# Altium PCB Gimbal19_V1.PcbDoc
Units mm, origin at the board's own origin, x right, y up, seen from the top; angles counter-clockwise.
Board outline 63 x 50 mm, 2 copper layers (Top Layer, Bottom Layer); 67 components, 35 nets, 217 pads, 40 vias.
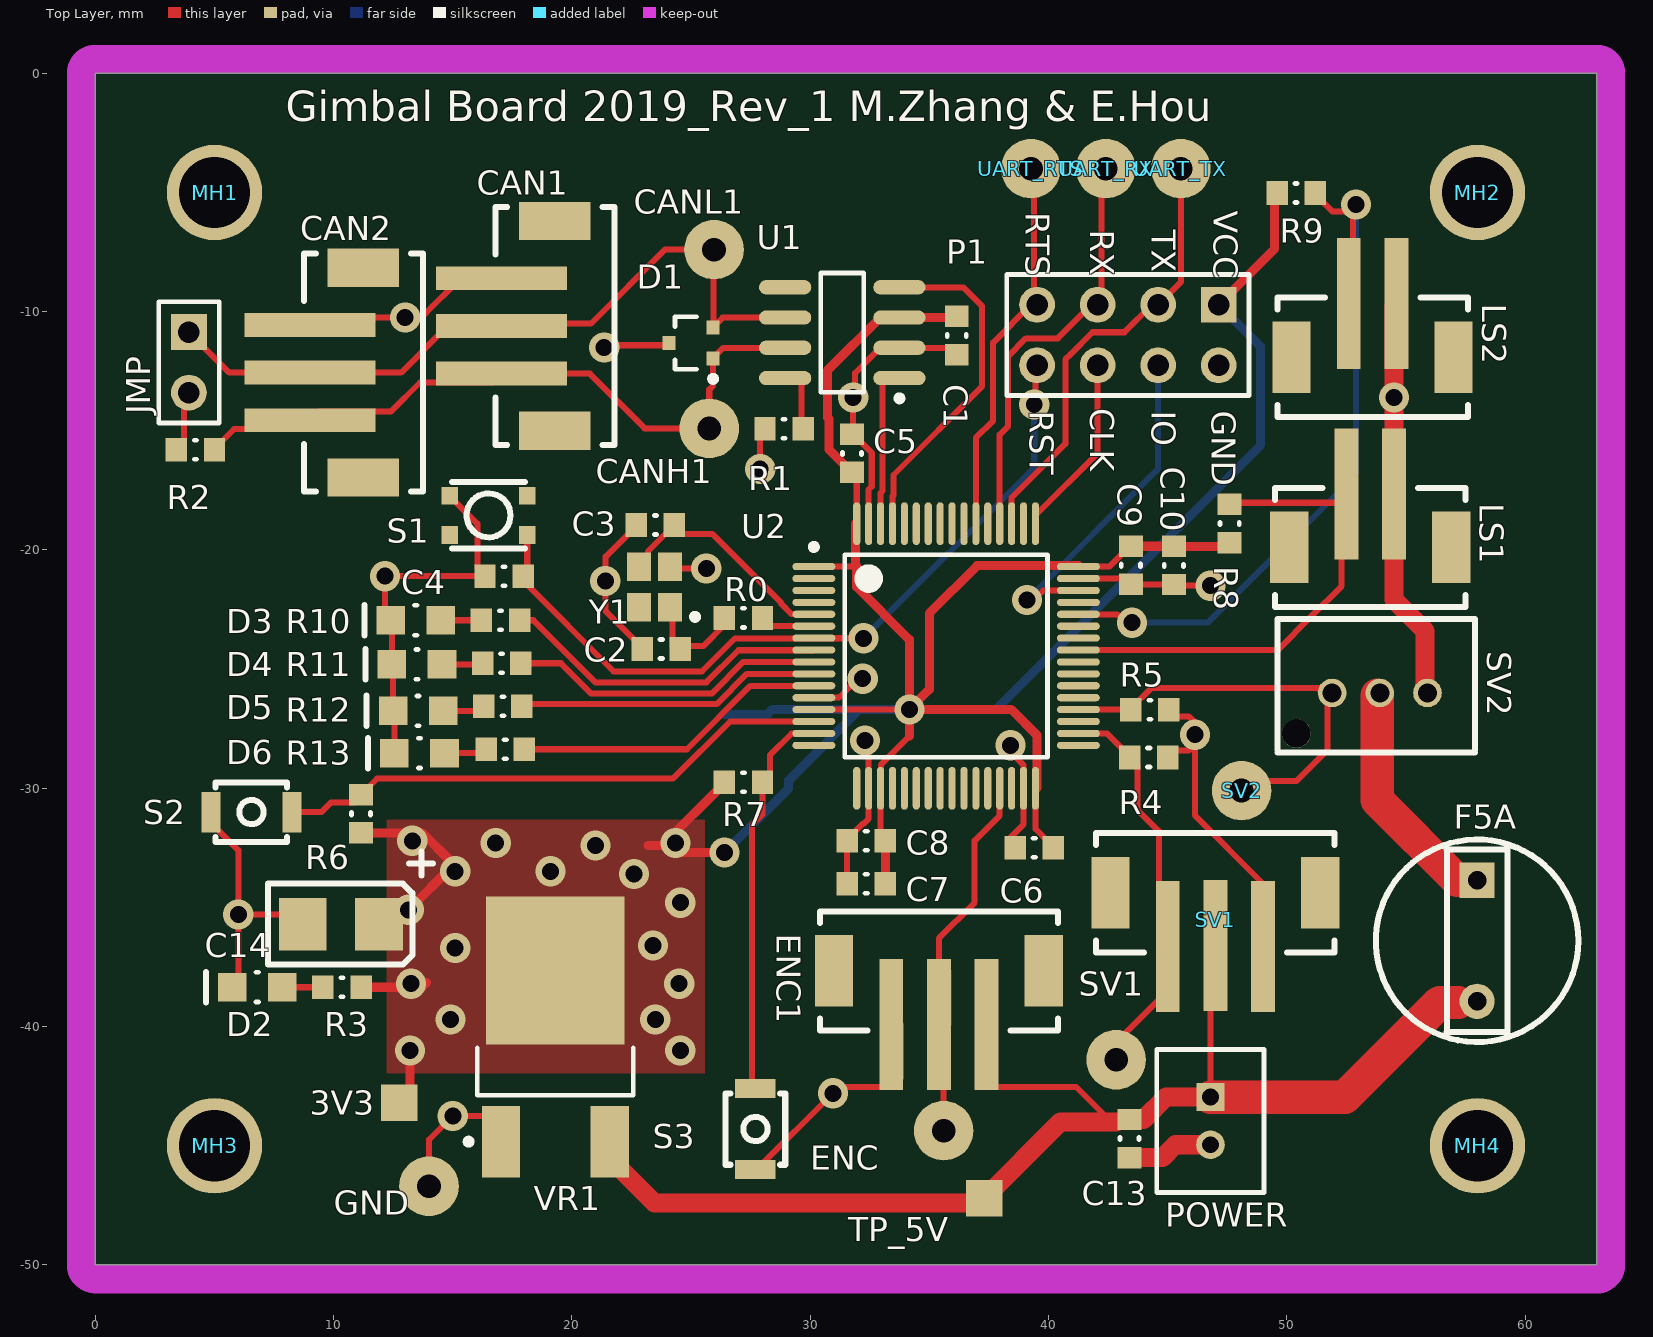
[diagram p0: Top Layer view]
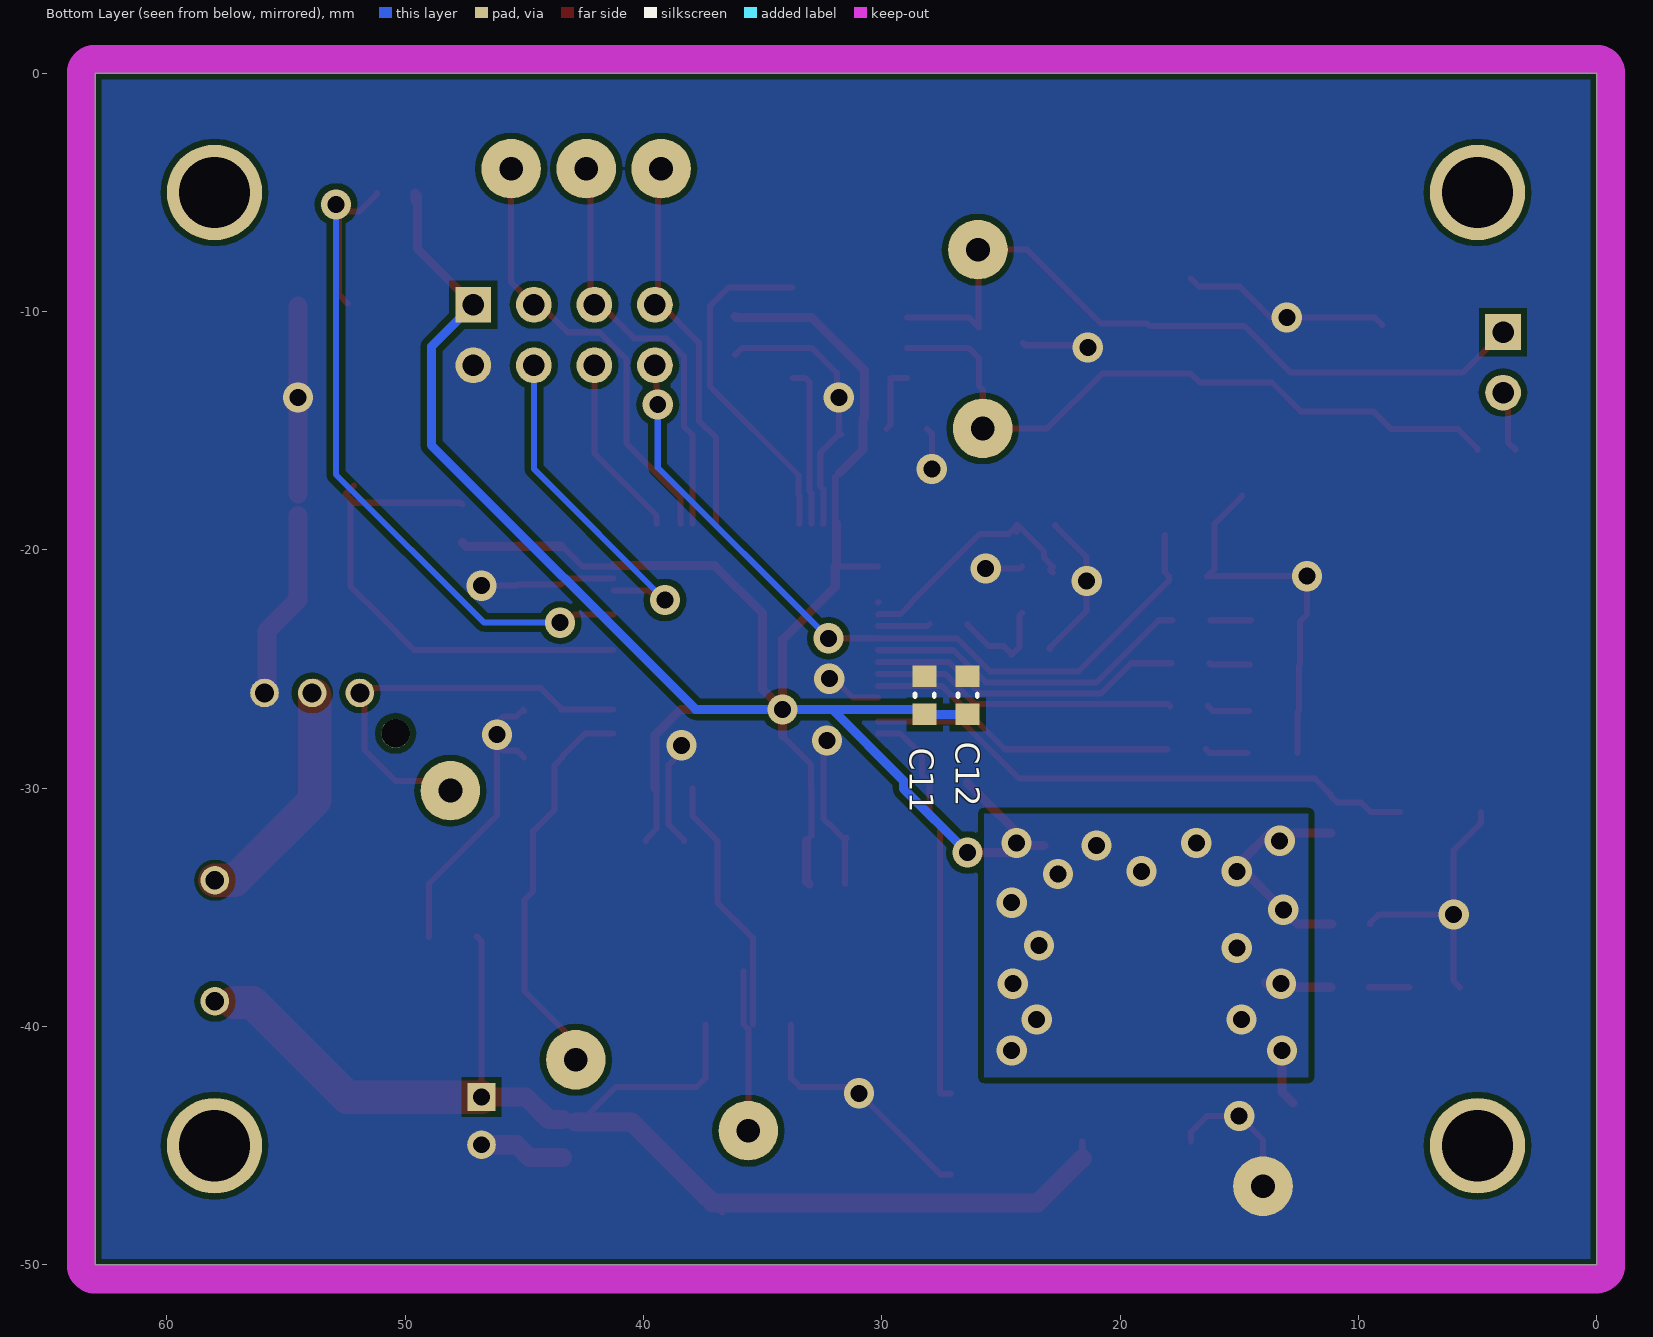
[diagram p1: Bottom Layer view, seen from below]

## Layer stack, top to bottom
Top Solder: solder mask 0.0102, Solder Resist, Dk 3.5
Top Layer: signal copper 0.0356
Dielectric 1: dielectric 0.32, FR-4, Dk 4.8
Bottom Layer: signal copper 0.0356
Bottom Solder: solder mask 0.0102, Solder Resist, Dk 3.5

## Board outline
0,-50 0,0 63,0 63,-50

## Design rules (kind name [scope] priority, off if disabled: settings)
Clearance Clearance_1 [All] p1: gap=0.254 ignorepadtopadclearanceinfootprint=TRUE except(0: Arc-Hole Track-Hole SMDPad-Hole THPad-Hole Via-Hole Fill-Hole Poly-Hole Region-Hole Text-Hole; 0.203: Arc-Arc Arc-Track Arc-SMDPad Track-Track Track-SMDPad)
HoleSize [All] p1: absolutevalues=TRUE maxlimit=3.5 minlimit=0.025 maxpercent=80.000 minpercent=20.000
PolygonConnect [All] p1: connectstyle=Direct reliefconductorwidth=0.254 reliefentries=4 polygonreliefangle="90 Angle" airgapwidth=0.254
RoutingVias [All] p1: holewidth=0.406 width=0.711 viastyle="Through Hole" minholewidth=0.406 minwidth=0.711 maxholewidth=0.711 maxwidth=1.27
SolderMaskExpansion [All] p1: expansion=0.102
Width [All] p1: maxlimit=1.5 minlimit=0.254 preferedwidth=0.254
29 further rules are at their usual default settings.

## Classes and differential pairs
component class support: D3 D4 D5 D6 ENC MH1 MH2 MH3 MH4 R4 R5 R6 R7 R8 R9 R10 R11 R12 R13 S2 S3 SV1 SV2 UART_RTS UART_RX UART_TX
component class power: 3V3 C13 C14 D2 GND R3 TP_5V VR1
component class mcu: C2 C3 C4 C5 C6 C7 C8 C9 C10 C11 C12 R0 S1 U2 Y1
component class connectors: CAN1 CAN2 ENC1 F5A LS1 LS2 P1 POWER SV1 SV2
component class can: C1 CANH1 CANL1 D1 JMP R1 R2 U1

## Components (designator, comment, footprint, x,y, rotation, side; value= is the part's Value field where it differs from the comment)
3V3 "*" TESTPOINT 12.75,-43.2 r90 top
C1 "CAP_0.1uF_16V_0603" CAPC0603(1608)55_N 36.147,-11 r90 top value=0.1uF
C2 "CAP_15pF_0603" CAPC0603(1608)55_N 23.75,-24.159 r0 top value=15pF
C3 "CAP_15pF_0603" CAPC0603(1608)55_N 23.5,-18.95 r0 top value=15pF
C4 "CAP_0.1uF_16V_0603" CAPC0603(1608)55_N 17.15,-21.104 r0 top value=0.1uF
C5 "CAP_0.1uF_16V_0603" CAPC0603(1608)55_N 31.75,-15.946 r90 top value=0.1uF
C6 "CAP_0.1uF_16V_0603" CAPC0603(1608)55_N 39.4,-32.5 r180 top value=0.1uF
C7 "CAP_0.1uF_16V_0603" CAPC0603(1608)55_N 32.35,-34.009 r180 top value=0.1uF
C8 "CAP_4.7uF_0603" CAPC0603(1608)55_N 32.35,-32.204 r0 top value=4.7uF
C9 "CAP_0.1uF_16V_0603" CAPC0603(1608)55_N 43.455,-20.644 r270 top value=0.1uF
C10 "CAP_4.7uF_0603" CAPC0603(1608)55_N 45.259,-20.65 r90 top value=4.7uF
C11 "CAP_10nF_0603" CAPC0603(1608)55_N 28.2,-26.1 r270 bottom value=10nF
C12 "CAP_1uF_16V_0603" CAPC0603(1608)55_N 26.396,-26.1 r270 bottom value=1uF
C13 "CAP_0.33uF_16V_0603" CAPC0603(1608)55_N 43.4,-44.7 r90 top value=0.33uF
C14 "CAP_10uF_1411_POL" AVX-CAPC3528_V 10.3,-35.7 r180 top value=10uF
CAN1 "CON_3M" JST-B3B-SM4-TB#1 21.785,-10.6 r90 top
CAN2 "CON_3M" JST-B3B-SM4-TB#1 13.75,-12.556 r90 top
CANH1 "TESTPOINT_LOOP" TESTPOINT_LOOP#1 25.761,-14.9 r270 top
CANL1 "TESTPOINT_LOOP" TESTPOINT_LOOP#1 25.962,-7.4 r270 top
D1 "TVS_DIODE_CAN" NXP-SOT323-3 25,-11.318 r180 top
D2 "DIO_LED_R" LED_0805_LINE 6.796,-38.35 r180 top
D3 "DIO_LED_Y" LED_0805_LINE 13.446,-22.95 r180 top
D4 "DIO_LED_G" LED_0805_LINE 13.495,-24.8 r180 top
D5 "DIO_LED_G" LED_0805_LINE 13.546,-26.75 r180 top
D6 "DIO_LED_G" LED_0805_LINE 13.6,-28.528 r180 top
ENC "TESTPOINT_LOOP" TESTPOINT_LOOP#1 35.6,-44.37 r0 top
ENC1 "CON_3M" JST-B3B-SM4-TB#1 35.4,-35.163 r180 top
F5A "FUSE" FUSE 57.983,-36.4 r270 top
GND "TESTPOINT_LOOP" TESTPOINT_LOOP#1 14,-46.7 r0 top
JMP "Header 2" HDR1X2 3.928,-10.858 r270 top (schematic designator 1)
LS1 "CON_2M" JST-B2B-SM4-TB 53.5,-22.396 r0 top
LS2 "CON_2M" JST-B2B-SM4-TB 53.6,-14.415 r0 top
MH1 "MOUNTING_HOLES" MOUNTING_HOLE#1 3.25,-4.15 r0 top
MH2 "MOUNTING_HOLES" MOUNTING_HOLE#2 66,0 r0 top
MH3 "MOUNTING_HOLES" MOUNTING_HOLE#3 3.2,-46.2 r0 top
MH4 "MOUNTING_HOLES" MOUNTING_HOLE#4 74.3,0 r0 top
P1 "HEADER 4X2" HEADER_2X4 47.14,-9.71 r180 top
POWER "CON_2M" JST-B2B-PHSK 46.794,-43.959 r270 top
R0 "RES_0R_0603" RESC0603(1608)_N 27.196,-22.85 r180 top value=0R
R1 "RES_0R_0603" RESC0603(1608)_N 28.9,-14.917 r180 top value=0R
R2 "RES_120R_0603" RESC0603(1608)_N 4.2,-15.797 r180 top value=120R
R3 "RES_100R_0603" RESC0603(1608)_N 10.35,-38.35 r0 top value=100R
R4 "RES_10K_0603" RESC0603(1608)_N 44.205,-28.709 r180 top value=10K
R5 "RES_10K_0603" RESC0603(1608)_N 44.25,-26.704 r180 top value=10K
R6 "RES_10K_0603" RESC0603(1608)_N 11.15,-31.07 r270 top value=10K
R7 "RES_10K_0603" RESC0603(1608)_N 27.196,-29.75 r0 top value=10K
R8 "RES_10K_0603" RESC0603(1608)_N 47.6,-18.891 r270 top value=10K
R9 "RES_10K_0603" RESC0603(1608)_N 50.389,-5.019 r180 top value=10K
R10 "RES_100R_0603" RESC0603(1608)_N 17,-22.95 r0 top value=100R
R11 "RES_100R_0603" RESC0603(1608)_N 17.05,-24.754 r0 top value=100R
R12 "RES_100R_0603" RESC0603(1608)_N 17.1,-26.558 r0 top value=100R
R13 "RES_100R_0603" RESC0603(1608)_N 17.2,-28.363 r0 top value=100R
S1 "SW_PWR" PTS830GM140 16.5,-18.548 r0 top
S2 "SW_TACTILE" B3U-1100P 6.55,-31 r180 top
S3 "SW_TACTILE" B3U-1100P 27.7,-44.3 r270 top
SV1 "TESTPOINT_LOOP" TESTPOINT_LOOP#1 42.838,-41.393 r90 top
SV1 "CON_3M" JST-B3B-SM4-TB#2 47,-31.885 r180 top
SV2 "CON_3M" "JST B03B-PASK" 52.9,-26 r180 top
SV2 "TESTPOINT_LOOP" TESTPOINT_LOOP#2 52.25,-43.04 r90 top
TP_5V "*" TESTPOINT 37.3,-47.2 r90 top (schematic designator TESTPOINT_5V)
U1 "IC TXRX CAN" LT-S8_N 31.343,-10.883 r180 top
U2 "STM32F091RC" STM_LQFP64_N 35.701,-24.45 r0 top
UART_RTS "TESTPOINT_LOOP" TESTPOINT_LOOP#3 39.26,-3.85 r90 top
UART_RX "TESTPOINT_LOOP" TESTPOINT_LOOP#4 42.4,-3.8 r90 top
UART_TX "TESTPOINT_LOOP" TESTPOINT_LOOP#1 45.55,-4 r90 top
VR1 "5V0_3V3_LDO" VOLTAGE_REGULATOR 19.3,-42.04 r0 top
Y1 "CRYSTAL_32MHZ" AVX-CX2520DB32000D0GEJZ1-4_V 23.466,-21.554 r180 top

## Footprints (in the part's own frame and the unit in brackets; to place one, negate y for a bottom-side part, rotate by r counter-clockwise, add the part's x,y. Pads: shape width x height; smd on the part's side, far side on the other; paste and mask are expansions set on the pad)
AVX-CAPC3528_V [mm] "SMT Capacitor, 2 Leads, Body 3.5x2.8mm"
  rect 2x2.2 smd: 1(-1.6,0) 2(1.6,0)
  silkscreen extent -3.87,-3.05 3.05,1.7, body extent -1.79,-1.54 1.8,1.54, height 1.9
AVX-CX2520DB32000D0GEJZ1-4_V [mm] "Hand Drawn, 4-Leads,Body 2.5x2mm"
  rect 1x1.2 smd: 1(-0.65,0.85) 2(-0.65,-0.85) 3(0.65,-0.85) 4(0.65,0.85)
  silkscreen extent -1.83,1.13 -1.58,1.38, body extent -1,-1.25 1,1.25, height 0.55
B3U-1100P [mm] "TACTILE SWITCH GREY"
  rect 0.8x1.7 smd: 1(-1.7,0) 2(1.7,0)
  silkscreen extent -1.5,-1.25 1.5,1.25
CAPC0603(1608)55_N [mm] "Chip Capacitor, Body 1.6x0.8mm, Height 0.55mm, IPC Medium Density"
  rect 0.9x1 smd: 1(-0.8,0) 2(0.8,0)
  silkscreen extent -0.05,-0.4 0.05,0.4, body extent -0.87,-0.48 0.88,0.47, height 0.55
FUSE [mm] "FUSE HOLDER RADIAL 250V 6.3A PCB"
  rect 1.48x1.48 / inner round 1.524 / far side round 1.2 hole 0.78: 1(-2.54,0)
  round 1.48 / inner round 1.524 / far side round 1.2 hole 0.78: 2(2.54,0)
  silkscreen extent -4.25,-4.25 4.25,4.25
HDR1X2 [mm] "Connector; Header; 2 Position"
  rect 1.5x1.5 hole 0.9: 1(0,0)
  round 1.5 hole 0.9: 2(2.54,0)
  silkscreen extent -1.27,-1.27 3.81,1.27
HEADER_2X4 [mm]
  rect 1.5x1.5 hole 0.9: 1(0,0)
  round 1.5 hole 0.9: 2(2.54,0) 3(5.08,0) 4(7.62,0) 5(0,2.54) 6(2.54,2.54) 7(5.08,2.54) 8(7.62,2.54)
  silkscreen extent -1.27,-1.27 8.89,3.81
"JST B03B-PASK" [mm] "PA TOP 3A 3POS 2mm Pitch"
  round 1.2 / inner round 1.524 / far side round 1.2 hole 0.8: 1(-3,0) 2(-1,0) 3(1,0)
  round 1.2 hole 1.2: 4(2.5,1.7)
  silkscreen extent -5,-3.1 3.3,2.5
JST-B2B-PHSK [mm]
  rect 1.162x1.162 / inner rect 1.524x1.524 / far side rect 1.162x1.162 hole 0.7: 1(-1,0)
  round 1.2 / inner round 1.524 / far side round 1.2 hole 0.7: 2(1,0)
  silkscreen extent -3,-2.25 3,2.25
JST-B2B-SM4-TB [mm]
  rect 1x5.5 smd: 1(-1,4.75) 2(1,4.75)
  rect 1.6x3 smd: 3(-3.4,2.5) 4(3.4,2.5)
  silkscreen extent -4,0 4,5
JST-B3B-SM4-TB#1 [mm]
  rect 1x5.5 smd: 1(-2,4.75) 2(0,4.75) 3(2,4.75)
  rect 1.6x3 smd: 4(-4.4,2.5) 5(4.4,2.5)
  silkscreen extent -5,0 5,5
JST-B3B-SM4-TB#2 [mm]
  rect 1x5.5 smd: 1(-2,4.75) 2(0,4.715) 3(2,4.75)
  rect 1.6x3 smd: 4(-4.4,2.5) 5(4.4,2.5)
  silkscreen extent -5,0 5,5
LED_0805_LINE [mm] "SMD, 2-Leads, Body 2x1.25mm"
  rect 1.2x1.2 smd: 1(-1.05,0) 2(1.05,0)
  silkscreen extent -0.05,-0.63 2.16,0.64, body extent -1,-0.63 1,0.63, height 0.8
LT-S8_N [mm] "SOP, 8-Leads, Body 4.9x3.9mm, Pitch 1.27mm, IPC Medium Density"
  oval 2.2x0.6 smd: 1(-2.4,1.905) 2(-2.4,0.635) 3(-2.4,-0.635) 4(-2.4,-1.905) 5(2.4,-1.905) 6(2.4,-0.635) 7(2.4,0.635) 8(2.4,1.905)
  silkscreen extent -2.53,-2.5 0.9,2.88, body extent -2,-2.5 2,2.5, height 1.76
MOUNTING_HOLE#1 [mm]
  round 4 hole 3 unplated: 0(1.75,-0.85)
MOUNTING_HOLE#2 [mm]
  round 4 hole 3 unplated: 0(-8,-5)
MOUNTING_HOLE#3 [mm]
  round 4 hole 3 unplated: 0(1.8,1.2)
MOUNTING_HOLE#4 [mm]
  round 4 hole 3 unplated: 0(-16.3,-45)
NXP-SOT323-3 [mm] "SOT23, 3-Leads, Body 2.2x1.35mm, Pitch 0.65mm"
  rect 0.55x0.6 smd paste-1: 1(-0.925,0.65) 2(-0.925,-0.65) 3(0.925,0)
  silkscreen extent -1.05,-1.1 0.67,1.62, body extent -1.15,-1.1 1.15,1.1, height 1.1
PTS830GM140 [mm] "PWR TACTILE SWITCH (RED)"
  rect 0.7x0.75 smd: 1(-1.625,0.825) 2(1.625,0.825) 3(-1.625,-0.825) 4(1.625,-0.825)
  silkscreen extent -1.53,-1.4 1.53,1.4
RESC0603(1608)_N [mm] "Chip Resistor, Body 1.6x0.8mm, IPC Medium Density"
  rect 0.9x1 smd: 1(-0.8,0) 2(0.8,0)
  silkscreen extent -0.05,-0.4 0.05,0.4, body extent -0.85,-0.47 0.85,0.47, height 0.6
STM_LQFP64_N [mm] "Thin QFP, 64-Leads, Body 10x10mm, Pitch 0.5mm, IPC Medium Density"
  oval 1.8x0.3 smd mask+0.05: 1(-5.55,3.75) 2(-5.55,3.25) 3(-5.55,2.75) 4(-5.55,2.25) 5(-5.55,1.75) 6(-5.55,1.25) 7(-5.55,0.75) 8(-5.55,0.25) 9(-5.55,-0.25) 10(-5.55,-0.75) 11(-5.55,-1.25) 12(-5.55,-1.75) 13(-5.55,-2.25) 14(-5.55,-2.75) 15(-5.55,-3.25) 16(-5.55,-3.75) 33(5.55,-3.75) 34(5.55,-3.25) 35(5.55,-2.75) 36(5.55,-2.25) 37(5.55,-1.75) 38(5.55,-1.25) 39(5.55,-0.75) 40(5.55,-0.25) 41(5.55,0.25) 42(5.55,0.75) 43(5.55,1.25) 44(5.55,1.75) 45(5.55,2.25) 46(5.55,2.75) 47(5.55,3.25) 48(5.55,3.75)
  oval 0.3x1.8 smd mask+0.05: 17(-3.75,-5.55) 18(-3.25,-5.55) 19(-2.75,-5.55) 20(-2.25,-5.55) 21(-1.75,-5.55) 22(-1.25,-5.55) 23(-0.75,-5.55) 24(-0.25,-5.55) 25(0.25,-5.55) 26(0.75,-5.55) 27(1.25,-5.55) 28(1.75,-5.55) 29(2.25,-5.55) 30(2.75,-5.55) 31(3.25,-5.55) 32(3.75,-5.55) 49(3.75,5.55) 50(3.25,5.55) 51(2.75,5.55) 52(2.25,5.55) 53(1.75,5.55) 54(1.25,5.55) 55(0.75,5.55) 56(0.25,5.55) 57(-0.25,5.55) 58(-0.75,5.55) 59(-1.25,5.55) 60(-1.75,5.55) 61(-2.25,5.55) 62(-2.75,5.55) 63(-3.25,5.55) 64(-3.75,5.55)
  silkscreen extent -5.67,-4.25 4.25,4.7, body extent -5,-5 5,5, height 1.6
TESTPOINT [mil]
  rect 60x60 smd: 1(0,0)
TESTPOINT_LOOP#1 [mm]
  round 2.5 hole 1: 1(0,0)
TESTPOINT_LOOP#2 [mm]
  round 2.5 hole 1: 1(12.94,4.15)
TESTPOINT_LOOP#3 [mm]
  round 2.5 hole 1: 1(-0.15,0)
TESTPOINT_LOOP#4 [mm]
  round 2.5 hole 1: 1(-0.2,0)
VOLTAGE_REGULATOR [mm] "DPAK, 3-Leads, Body 6.095x6.54mm, Pitch 4.57mm"
  rect 1.6x3 smd: 1(-2.285,-2.79) 3(2.285,-2.79)
  rect 5.8x6.2 smd: 2(0,4.39)
  silkscreen extent -3.76,-2.91 3.27,1.14, body extent -3.27,-0.84 3.27,5.25, height 2.38

## Part data
3V3 TP_5V: "TESTPOINT_SMD"
C1 C4 C5 C6 C7 C9: "CAP CER 0.1UF 16V X7R 0603", Digikey Part Number=311-1088-1-ND, Manufacturer=Yageo, MPN=CC0603KRX7R7BB104, Package="0603 (1608 Metric)", Temperature Coefficient=X7R, Voltage Rating=16V, Dimensions="0.063\" L x 0.031\" W (1.60mm x 0.80mm)"
C2 C3: "CAP CER 15PF 250V NPO 0603", Digikey Part Number=311-3282-1-ND, Manufacturer=Yageo, MPN=AC0603JRNPOYBN150, Package="0603 (1608 Metric)", Temperature Coefficient=NP0, Voltage Rating=250v, Dimensions="0.063\" L x 0.031\" W (1.60mm x 0.80mm)"
C8 C10: "CAP CER 4.7UF 6.3V X5R 0603", Digikey Part Number=311-1521-1-ND, Manufacturer=Yageo, MPN=CC0603KRX5R5BB475, Package="0603 (1608 Metric)", Temperature Coefficient=X5R, Voltage Rating=6.3V, Dimensions="0.063\" L x 0.031\" W (1.60mm x 0.80mm)"
C11: "CAP CER 10000PF 16V X7R 0603", Digikey Part Number=311-3369-1-ND, Manufacturer=Yageo, MPN=CC0603KRX7R7BB103, Package="0603 (1608 Metric)", Temperature Coefficient=X7R, Voltage Rating=16V, Dimensions="0.063\" L x 0.031\" W (1.60mm x 0.80mm)"
C12: "CAP CER 1UF 16V Y5V 0603", Digikey Part Number=311-1372-1-ND, Manufacturer=Yageo, MPN=CC0603ZRY5V7BB105, Package="0603 (1608 Metric)", Temperature Coefficient=Y5V, Voltage Rating=16V, Dimensions="0.063\" L x 0.031\" W (1.60mm x 0.80mm)"
C13: "CAP CER 0.33UF 16V X7R 0603", Digikey Part Number=490-6050-1-ND, Manufacturer="Murata Electronics North America", MPN=GCM188R71C334KA37D, Package="0603 (1608 Metric)", Temperature Coefficient=X7R, Voltage Rating=16V, Dimensions="0.063\" L x 0.031\" W (1.60mm x 0.80mm)"
C14: "CAP TANT 10UF 20% 10V 1411", Digikey Part Number=478-12047-1-ND, Manufacturer="AVX Corporation", MPN=F971A106MBAHT3, Package="1411 (3528 Metric)", Voltage Rating=10V, Dimensions="0.063\" L x 0.031\" W (1.60mm x 0.80mm)"
D1: "TVS DIODE 24V 41V SOT323-3", Digikey Part Number=1727-3891-1-ND, Manufacturer="Nexperia USA Inc.", MPN=PESD2CAN,215, Package="SC-70, SOT-323", ComponentLink1Description=Datasheet, ComponentLink1URL=https://assets.nexperia.com/documents/data-sheet/PESD1CAN-U.pdf
D2: "LED RED DIFFUSED 0805 SMD", Digikey Part Number=475-1278-1-ND, Forward Voltage Drop=2V, Manufacturer=OSRAM, MPN="LS R976-NR-1", Package="0805 (2012 Metric)"
D3: "LED YELLOW DIFFUSED 0805 SMD", Digikey Part Number=475-2560-1-ND, Forward Voltage Drop=2.2V, Manufacturer=OSRAM, MPN="LY R976-PS-36", Package="0805 (2012 Metric)"
D4 D5 D6: "LED GREEN DIFFUSED 0805 SMD", Digikey Part Number=475-1410-1-ND, Forward Voltage Drop=2.2V, Manufacturer=OSRAM, MPN="LG R971-KN-1", Package="0805 (2012 Metric)"
F5A: library part FUSE-5A, "FUSE HOLDER RADIAL 250V 6.3A PCB"
JMP: "Header, 2-Pin", LatestRevisionDate=17-Jul-2002, LatestRevisionNote="Re-released for DXP Platform.", Publisher="Altium Limited"
MH1 MH2 MH3 MH4: "6cm x 6cm"
P1: "Header, 4-Pin Dual row", Digikey Part Number=S9015E-04-ND, Manufacturer="Sullins Connector Solutions", MPN=GRPB042VWVN-RC
R0 R1: "RES SMD 0 OHM JUMPER 1/10W 0603", Digikey Part Number=311-0.0GRCT-ND, Manufacturer=Yageo, MPN=RC0603JR-070RL, Package="0603 (1608 Metric)", Dimensions="0.063\" L x 0.031\" W (1.60mm x 0.80mm)"
R2: "RES SMD 120 OHM 5% 1/10W 0603", Digikey Part Number=311-120GRCT-ND, Manufacturer=Yageo, MPN=RC0603JR-07120RL, Package="0603 (1608 Metric)", Tolerance=5%, Dimensions="0.063\" L x 0.031\" W (1.60mm x 0.80mm)"
R3 R10 R11 R12 R13: "RES SMD 100 OHM 1% 1/10W 0603", Digikey Part Number=311-100HRCT-ND, Manufacturer=Yageo, MPN=RC0603FR-07100RL, Package="0603 (1608 Metric)", Tolerance=1%, Dimensions="0.063\" L x 0.031\" W (1.60mm x 0.80mm)"
R4 R5 R6 R7 R8 R9: "RES SMD 10K OHM 5% 1/10W 0603", Digikey Part Number=311-10KGRCT-ND, Manufacturer=Yageo, MPN=RC0603JR-0710KL, Package="0603 (1608 Metric)", Tolerance=5%, Dimensions="0.063\" L x 0.031\" W (1.60mm x 0.80mm)"
S1: "Power Switch (Red)", Digikey Part Number=CKN10587CT-ND, Manufacturer=C&K, MPN="PTS830GM140 SMTR LFS", ComponentLink1Description=Datasheet, ComponentLink1URL=https://www.ckswitches.com/media/1478/pts830.pdf
S2 S3: "Tactile Switch (Grey)", Digikey Part Number=SW1021TR-ND, Manufacturer="Omron Electronics Inc-EMC Div", MPN=B3U-1100P
U1: library part LTC2875, "IC TXRX CAN 4MBPS 8SO", Digikey Part Number=LTC2875IS8#PBF-ND, Manufacturer="Linear Technologies", MPN=LTC2875IS8#PBF, Package="8-SOIC (0.154\", 3.90mm Width)", ComponentLink1Description=Datasheet, ComponentLink1URL=https://www.analog.com/media/en/technical-documentation/data-sheets/2875f.pdf
U2: Digikey Part Number=497-15167-ND, Manufacturer=STMicroelectronics, Package=64-LQFP, ComponentLink1Description=Datasheet, ComponentLink1URL=https://www.st.com/content/ccc/resource/technical/document/datasheet/95/3c/2e/5b/21/09/45/a6/DM00115237.pdf/files/DM00115237.pdf/jcr:content/translations/en.DM00115237.pdf#%5B%7B%22num%22%3A96%2C%22gen%22%3A0%7D%2C%7B%22name%22%3A%22XYZ%22%7D%2C67%2C755%2Cnull%5D, MPN=STM32F091RC
VR1: "IC REG LINEAR 3.3V 1A DPAK", Current Output=1A, Digikey Part Number=NCP1117DT33T5GOSCT-ND, Manufacturer="ON Semiconductor", MPN=NCP1117DT33T5G
Y1: "CRYSTAL 32MHZ 8PF SMD", Digikey Part Number=1253-1730-1-ND, Manufacturer="Kyocera International Inc. Electronic Components", MPN=CX2520DB32000D0GPSC1, Package="4-SMD, No Lead", Dimensions="0.098\" L x 0.079\" W (2.50mm x 2.00mm)"

## Via types
v1: diameter 1.27, hole 0.711, Top Layer to Bottom Layer, 40 vias

## Nets (pads, with @x,y where several pads share a name; then routed paths per layer and width w, separated by ;. In a path a pad name is that pad's centre, name@x,y a point inside that pad or via, vN(x,y) a via of type N, cw(c..) or ccw(c..) an arc to the next point about the centre after c; other vN are vias at no path point)
+3V3: 3V3.1 C1.2 C5.1 C6.1 C7.1 C8.2 C9.1 C10.2 C11.2 C12.2 C14.1 P1.1 R3.2 R6.2 R7.1 R8.2 R9.2 U1.3 U2.1 U2.13 U2.19 U2.32 U2.48 U2.64 VR1.2 | length 133.7
  Top Layer w0.254: U2.13 30.155,-26.696 34.159,-26.696 v1(34.163,-26.691) ; U2.1 31.951,-20.7 ; C5.1 31.951,-16.946 U2.64 ; C8.2 32.951,-32.005 U2.19 32.96,-29.991 32.96,-29.019 34.163,-27.816 ; U2.32 39.451,-31.705 39.9,-32.154 C6.1@39.9,-32.204 ; U2.48 42.549,-20.7 43.405,-19.844 C9.1
  Top Layer w0.381: C14.1@11.1,-35.7 12.55,-35.7 v1(13.15,-35.1) 14.945,-33.305 14.945,-33.095 13.72,-31.87 R6.2 ; R3.2 13.7,-38.35 13.9,-38.15 ; 3V3.1 13.2,-42.75 v1(13.2,-41) ; 23.2,-32.4 23.796,-32.4 26.396,-29.8 R7.1 ; v1@24.5,-32.7 v1(26.4,-32.7) v1@26.4,-32.425 ; C5.1 30.784,-15.78 30.784,-14.498 30.72,-14.435 30.72,-12.47 32.943,-10.248 U1.3 36.099,-10.248 C1.2 ; U2.64@31.907,-18.9 31.907,-20.656 31.951,-20.7 31.951,-21.551 34.163,-23.763 v1(34.163,-26.691) ; C7.1@33.05,-34.009 33.15,-33.908 C8.2 ; 34.163,-27.816 v1(34.163,-26.691) ; U2.32@39.494,-30 39.516,-29.978 39.516,-27.779 38.428,-26.691 v1(34.163,-26.691) ; U2.48@41.251,-20.656 37.003,-20.656 35,-22.66 35,-25.854 v1(34.163,-26.691) ; C9.1 45.253,-19.844 C10.2 47.441,-19.85 R8.2 ; P1.1 49.489,-7.361 49.489,-5.119 R9.2 R9.2@49.589,-5.361
  Bottom Layer w0.381: C12.2 C11.2 28.409,-26.691 32.072,-26.691 ; v1(26.4,-32.7) 29.087,-30.013 29.087,-29.676 32.072,-26.691 ; P1.1 48.9,-11.47 48.9,-15.6 37.809,-26.691 v1(34.163,-26.691) 32.072,-26.691
  other v1: 24.55,-41 14.9,-39.7 23.5,-39.7 13.25,-38.2 24.5,-38.2 15.1,-36.7 23.4,-36.6 24.55,-34.8 22.6,-33.6 15.1,-33.486 19.1,-33.486 20.984,-32.4 16.8,-32.3 24.35,-32.3 13.3,-32.204
+5V: C13.2 ENC1.1 F5A.2 POWER.1 SV1.2 TP_5V.1 VR1.3 | length 55.6
  Top Layer w0.254: VR1.3@21.585,-45.53 VR1.3 ; TP_5V.1@36.691,-47.809 37.1,-47.4 TP_5V.1 ; ENC1.1 37.4,-42.163 37.773,-42.536 41.155,-42.536 42.619,-44 ; POWER.1 46.794,-36.421 SV1.2@47,-36.215
  Top Layer w0.8: VR1.3@21.585,-45.53 23.455,-47.4 TP_5V.1@37.1,-47.4 ; TP_5V.1 40.5,-44 42.619,-44 42.859,-44 ; C13.2 43.983,-43.9 44.924,-42.959 POWER.1
  Top Layer w1.4: POWER.1 52.441,-42.959 56.41,-38.99 57.2,-38.99
CAN_H: CAN1.1 CAN2.1 CANH1.1 D1.1 R2.1 U1.7 | length 29.3
  Top Layer w0.254: R2.1 5,-15.747 5.818,-14.929 8.627,-14.929 CAN2.1 9.373,-14.183 12.412,-14.183 13.622,-12.973 16.661,-12.973 CAN1.1 20.75,-12.6 23.05,-14.9 CANH1.1 25.761,-13.269 25.925,-13.105 D1.1 25.925,-11.944 26.351,-11.518 U1.7
CAN_L: CAN1.2 CAN2.2 CANL1.1 D1.2 JMP.1 U1.6 | length 31.3
  Top Layer w0.254: JMP.1 5.626,-12.556 CAN2.2 12.829,-12.556 14.784,-10.6 CAN1.2 18.75,-10.6 18.85,-10.5 20.8,-10.5 23.9,-7.4 CANL1.1 25.944,-7.419 D1.2@25.944,-10.625 ; D1.2 25.944,-10.65 D1.2@25.944,-10.625 ; U1.6 26.321,-10.248 D1.2@25.944,-10.625
GND: C1.1 C2.1 C3.1 C4.1 C5.2 C6.2 C7.2 C8.1 C9.2 C10.1 C11.1 C12.1 C13.1 C14.2 CAN1.3 CAN2.3 D1.3 D2.2 D3.2 D4.2 D5.2 D6.2 ENC1.3 GND.1 LS1.2 LS2.2 P1.5 POWER.2 R1.2 R4.1 R5.1 S1.1 S2.2 S3.2 SV1.1@49,-36.635 SV2.1@55.9,-26 U1.2 U2.12 U2.18 U2.31 U2.47 U2.63 VR1.1 Y1.2 | length 129.2
  Top Layer w0.254: S2.2 4.85,-31.45 6,-32.6 v1(6,-35.3) ; D2.2 6,-38.096 v1(6,-35.3) ; CAN2.3 9.308,-10.248 v1(13,-10.248) 13.669,-10.248 14.148,-9.77 14.97,-8.948 16.687,-8.948 CAN1.3 ; C14.2@9.5,-35.7 9.5,-35.65 9.15,-35.3 v1(6,-35.3) ; D6.2 12.55,-26.804 D5.2 12.496,-24.851 D4.2 12.445,-22.999 D3.2 12.15,-22.704 v1(12.15,-21.1) C4.1@16.346,-21.1 ; GND.1@14,-47.2 GND.1 14,-44.75 v1(15,-43.75) 16.342,-43.75 17.015,-44.423 VR1.1 ; S1.1 14.875,-17.748 16.027,-18.9 16.027,-20.781 C4.1@16.346,-21.1 ; C4.1 C4.1@16.346,-21.1 ; v1(21.35,-11.5) 21.441,-11.409 23.984,-11.409 D1.3 ; C3.1 22.7,-19 21.416,-20.284 21.416,-21.284 v1(21.4,-21.3) 21.4,-22.558 22.95,-24.109 C2.1 ; Y1.2 24.193,-20.781 v1(25.639,-20.781) ; S3.2@27.1,-46.2 27.55,-46.2 31.214,-42.536 33.427,-42.536 33.8,-42.163 ENC1.3@33.8,-39.913 ; R1.2 27.9,-15.117 27.9,-16.357 v1@28.143,-16.6 ; U2.12 30.16,-26.191 31.209,-26.191 32,-25.4 v1(32.2,-25.4) ; C8.1@31.471,-32.075 C8.1@31.55,-32.154 ; C7.2 C8.1@31.55,-32.154 ; C8.1 C8.1@31.55,-32.154 ; v1(32.3,-28) 32.442,-28.142 32.442,-29.991 U2.18 32.451,-31.281 32.26,-31.472 32.232,-31.472 C8.1@31.55,-32.154 ; U2.63@32.46,-18.909 U2.63 32.451,-17.462 32.58,-17.333 32.58,-15.926 31.8,-15.146 C5.2 31.7,-15.146 31.8,-15.046 v1(31.8,-13.6) 31.877,-13.523 31.877,-12.584 32.943,-11.518 U1.2 35.865,-11.518 C1.1 ; C6.2@38.3,-32.204 38.3,-32.154 38.951,-31.504 U2.31 38.942,-29.991 38.942,-29.017 38.4,-28.475 v1(38.4,-28.2) ; U2.47 43.211,-21.2 C9.2 43.461,-21.45 C10.1 45.265,-21.444 45.321,-21.5 v1(46.8,-21.5) ; R4.1 45.296,-28.418 45.882,-28.418 v1@46.15,-28.15 ; R5.1@45.005,-26.749 R5.1 45.327,-26.982 45.882,-26.982 46.15,-27.25 v1(46.15,-27.75) v1@46.15,-28.15 ; SV1.1@49,-36.25 49,-34 46.15,-31.15 v1@46.15,-28.15 ; LS2.2@54.4,-9.665 LS2.2@54.5,-9.765
  Top Layer w0.8: C13.1 44.783,-45.5 45.324,-44.959 POWER.2 ; LS1.2@54.5,-18.549 54.5,-22.1 55.8,-23.4 SV2.1@55.8,-25.7 ; LS1.2 v1(54.5,-13.6) LS2.2@54.5,-9.765
  other v1: 30.95,-42.8 27.9,-16.6
Net1_2: JMP.2 R2.2 | length 2.6
  Top Layer w0.254: R2.2 3.723,-15.474 3.723,-13.602 JMP.2
NetC2_2: C2.2 R0.2 Y1.1 | length 4.4
  Top Layer w0.254: Y1.1@24.116,-22.654 24.227,-22.765 24.227,-24.085 24.55,-24.409 24.55,-24.359 24.873,-24.035 25.51,-24.035 26.396,-23.15 R0.2@26.396,-23.1
NetC3_2: C3.2 U2.5 Y1.3 | length 10
  Top Layer w0.254: Y1.3@22.816,-20.954 Y1.3@22.941,-20.829 ; Y1.3 23.189,-20.331 23.189,-20.064 24.304,-18.95 C3.2@24.35,-18.95 ; C3.2@24.35,-19.25 C3.2@24.35,-19.2 ; C3.2@24.35,-19 24.673,-19.323 25.886,-19.323 28.776,-22.213 28.776,-22.254 29.213,-22.691 30.142,-22.691 U2.5
NetD2_1: D2.1 R3.1 | length 1.7
  Top Layer w0.254: D2.1 R3.1
NetD3_1: D3.1 R10.1 | length 1.7
  Top Layer w0.254: D3.1 R10.1
NetD4_1: D4.1 R11.1 | length 1.7
  Top Layer w0.254: D4.1 16.204,-24.8 R11.1
NetD5_1: D5.1 R12.1 | length 1.8
  Top Layer w0.254: D5.1 16.109,-26.75 R12.1
NetD6_1: D6.1 R13.1 | length 1.8
  Top Layer w0.254: D6.1 16.234,-28.528 R13.1
NetENC1_2: ENC1.2 ENC.1 U2.29 | length 17.8
  Top Layer w0.254: ENC1.2 35.4,-36.3 36.9,-34.8 36.9,-32.201 37.951,-31.15 U2.29 ; ENC.1 35.6,-40.113 35.8,-39.913 ENC1.2@35.8,-37.663
NetF5A_1: F5A.1 SV2.2 | length 10
  Top Layer w1.4: SV2.2@53.8,-26.1 53.8,-30.51 57.15,-33.86 F5A.1
NetLS1_1: LS1.1 R8.1 U2.41 | length 21.4
  Top Layer w0.254: U2.41 49.617,-24.2 51.03,-22.787 52.3,-21.517 LS1.1@52.3,-17.846 ; R8.1 47.672,-18.019 52.127,-18.019 LS1.1@52.3,-17.846 ; LS1.1@52.154,-17.3 LS1.1 LS1.1@52.3,-17.846
NetLS2_1: LS2.1 R9.1 U2.44 | length 32.1
  Top Layer w0.254: U2.44 42.875,-22.7 43.225,-23.05 v1(43.5,-23.05) ; R9.1 51.189,-5.069 51.92,-5.8 52.6,-5.8 v1@52.773,-5.627 ; LS2.1@52.4,-9.665 52.773,-9.292 v1@52.773,-5.627 ; v1(52.9,-5.5) v1@52.773,-5.627
  Bottom Layer w0.254: v1(43.5,-23.05) 46.687,-23.05 52.9,-16.837 v1(52.9,-5.5)
NetP1_2: P1.2 U2.51 UART_TX.1 | length 18.5
  Top Layer w0.254: U2.51 38.451,-17.799 40.705,-15.545 40.705,-12.005 40.929,-11.782 41.846,-10.865 43.185,-10.865 P1.2@44.34,-9.71 ; P1.2 45.55,-8.76 UART_TX.1
NetP1_3: P1.3 U2.52 UART_RX.1 | length 17.6
  Top Layer w0.254: U2.52 37.951,-15.159 38.3,-14.809 38.3,-11.871 39.052,-11.119 40.391,-11.119 P1.3@41.8,-9.71 ; P1.3 42.23,-9.54 42.23,-3.97 UART_RX.1@42.4,-3.8
NetP1_4: P1.4 U2.54 UART_RTS.1 | length 16.1
  Top Layer w0.254: U2.54 36.951,-15.299 37.672,-14.578 37.672,-11.298 P1.4@39.26,-9.71 ; UART_RTS.1@39.26,-3.85 39.39,-3.98 39.39,-9.58 P1.4
NetP1_6: P1.6 U2.46 | length 14.4
  Top Layer w0.254: v1(39.1,-22.1) 39.375,-22.1 39.775,-21.7 U2.46
  Bottom Layer w0.254: v1(39.1,-22.1) 44.6,-16.6 P1.6
NetP1_7: P1.7 U2.49 | length 7.7
  Top Layer w0.254: U2.49 39.451,-18.549 42.06,-15.94 P1.7
NetR0_1: R0.1 U2.6 | length 2.2
  Top Layer w0.254: R0.1@27.996,-23.1 28.096,-23.2 U2.6
NetR1_1: R1.1 U1.8 | length 2.9
  Top Layer w0.254: U1.8 29.64,-12.788 29.64,-14.757 R1.1@29.8,-14.917
NetR4_2: R4.2 SV1.1@42.838,-41.393 SV1.3 U2.34 | length 16.8
  Top Layer w0.254: U2.34 41.26,-27.709 42.455,-27.709 43.405,-28.659 R4.2 43.728,-29.032 43.728,-30.905 44.627,-31.804 44.627,-34.327 45,-34.7 SV1.3 45,-38.5 42.838,-40.662 SV1.1@42.838,-41.393
NetR5_2: R5.2 SV2.1@48.1,-30.1 SV2.3 U2.36 | length 17.4
  Top Layer w0.254: U2.36 43.446,-26.7 R5.2 43.45,-26.654 44.304,-25.8 51.3,-25.8 51.7,-26.2 51.7,-28.4 50.4,-29.7 49.1,-29.7 48.9,-29.9 SV2.1@48.1,-29.9
NetR6_1: R6.1 S2.1 U2.14 | length 23.5
  Top Layer w0.254: S2.1 9.485,-31 9.892,-30.593 10.884,-30.593 R6.1@11.15,-30.327 ; R6.1 11.82,-29.6 24.236,-29.6 26.636,-27.2 U2.14
NetR7_2: R7.2 S3.1 U2.15 | length 17.2
  Top Layer w0.254: S3.1@27.1,-42.8 27.55,-42.8 27.55,-31.55 27.996,-31.104 R7.2 28.319,-29.427 28.319,-28.602 29.213,-27.709 30.142,-27.709 U2.15
NetR10_2: R10.2 U2.8 | length 14
  Top Layer w0.254: R10.2 18.377,-22.95 20.984,-25.557 25.639,-25.557 26.988,-24.209 30.142,-24.209 U2.8
NetR11_2: R11.2 U2.9 | length 13.4
  Top Layer w0.254: R11.2 19.535,-24.754 20.795,-26.014 25.882,-26.014 27.197,-24.7 U2.9
NetR12_2: R12.2 U2.10 | length 12.8
  Top Layer w0.254: R12.2 17.987,-26.472 26.072,-26.472 27.343,-25.2 U2.10
NetR13_2: R13.2 U2.11 | length 13.3
  Top Layer w0.254: R13.2 24.827,-28.363 27.49,-25.7 U2.11
NetU1_1: U1.1 U2.62 | length 6.8
  Top Layer w0.254: U2.62 32.951,-17.609 33.037,-17.522 33.037,-12.948 33.197,-12.788 U1.1
NetU1_4: U1.4 U2.61 | length 14.5
  Top Layer w0.254: U2.61 33.46,-18.891 33.46,-17.746 33.495,-17.711 33.495,-16.855 37.215,-13.135 37.215,-9.765 36.428,-8.978 U1.4
R\S\T\: C4.2 P1.8 S1.4 U2.7 | length 32.9
  Top Layer w0.254: S1.4 18.125,-20.929 C4.2 17.95,-21.3 21.75,-25.1 25.45,-25.1 26.841,-23.709 30.142,-23.709 U2.7 30.155,-23.704 32.228,-23.704 v1(32.232,-23.709) ; v1(39.4,-13.9) 39.46,-13.84 39.46,-12.31 P1.8
  Bottom Layer w0.254: v1(32.232,-23.709) 39.4,-16.541 v1(39.4,-13.9)
pads on no net: CAN1.4 CAN1.5 CAN2.4 CAN2.5 ENC1.4 ENC1.5 LS1.3 LS1.4 LS2.3 LS2.4 MH1.0 MH2.0 MH3.0 MH4.0 S1.2 S1.3 SV1.4 SV1.5 SV2.4 U1.5 U2.2 U2.3 U2.4 U2.16 U2.17 U2.20 U2.21 U2.22 U2.23 U2.24 U2.25 U2.26 U2.27 U2.28 U2.30 U2.33 U2.35 U2.37 U2.38 U2.39 U2.40 U2.42 U2.43 U2.45 U2.50 U2.53 U2.55 U2.56 U2.57 U2.58 U2.59 U2.60 Y1.4
copper on no net: | length 0
  Top Layer w0.254: 30.142,-22.191 30.151,-22.2

## Polygon pours and split planes (outlines as drawn)
GND on Bottom Layer "Bottom Layer-GND" (solid, pour order 6): 0,0 63,0 63,-50 0,-50
no net on Bottom Layer "Bottom Layer-No Net" (solid, pour order 4): 2.5,-2
+3V3 on Bottom Layer "bot3v3" (solid, pour order 2): 25.697,-31.069 25.697,-42.118 12.108,-42.118 12.108,-31.069
+3V3 on Top Layer "top3v3" (solid, pour order 0): 25.57,-41.953 25.57,-31.323 12.235,-31.323 12.235,-41.953

## Keep-outs
Keep-Out Layer:
  lines w1.2: -0.6,-50 ccw(c0,-50) 0,-50.6 ; -0.6,-50 ccw(c0,-50) 0,-50.6 ; -0.6,-50 -0.6,0 ; -0.6,0 cw(c0,0) 0,0.6 ; -0.6,0 cw(c0,0) 0,0.6 ; 0,-50.6 63,-50.6 ; 0,0.6 63,0.6 ; 63,-50.6 ccw(c63,-50) 63.6,-50 ; 63,-50.6 ccw(c63,-50) 63.6,-50 ; 63,0.6 cw(c63,0) 63.6,0 ; 63,0.6 cw(c63,0) 63.6,0 ; 63.6,-50 63.6,0

## Silkscreen, mask and mechanical layers (free items; w line width, h text height)
Top Overlay:
  text "Gimbal Board 2019_Rev_1 M.Zhang & E.Hou" at 8,-2 h1.27

## Text inside footprints (layer, text, board x,y; h text height)
P1: Top Overlay "TX" at 44.34,-6.558 h1.02 r270; Top Overlay "RX" at 41.74,-6.558 h1.02 r270; Top Overlay "RTS" at 39.04,-5.831 h1.02 r270; Top Overlay "IO" at 44.34,-14.156 h1.02 r270; Top Overlay "CLK" at 41.74,-14.056 h1.02 r270; Top Overlay "RST" at 39.22,-14.156 h1.02 r270; Top Overlay "VCC" at 46.94,-5.756 h1.02 r270; Top Overlay "GND" at 46.84,-14.156 h1.02 r270